# EAGLE board cpu2 (EAGLE 5.00)
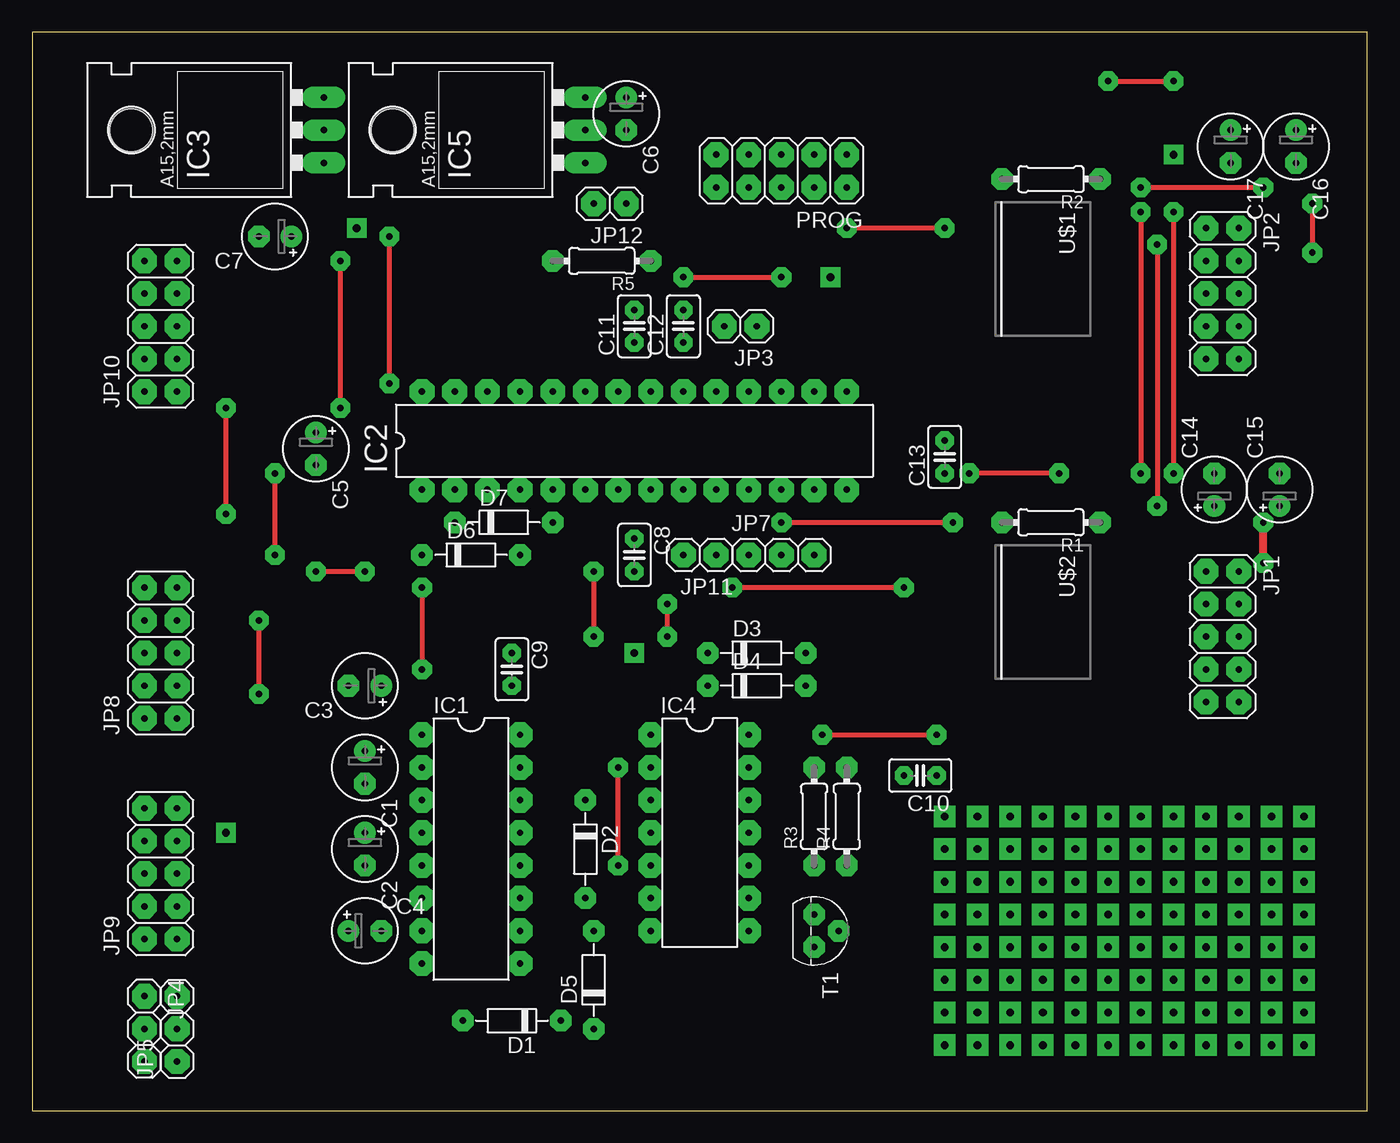
[diagram p0: board, top side]
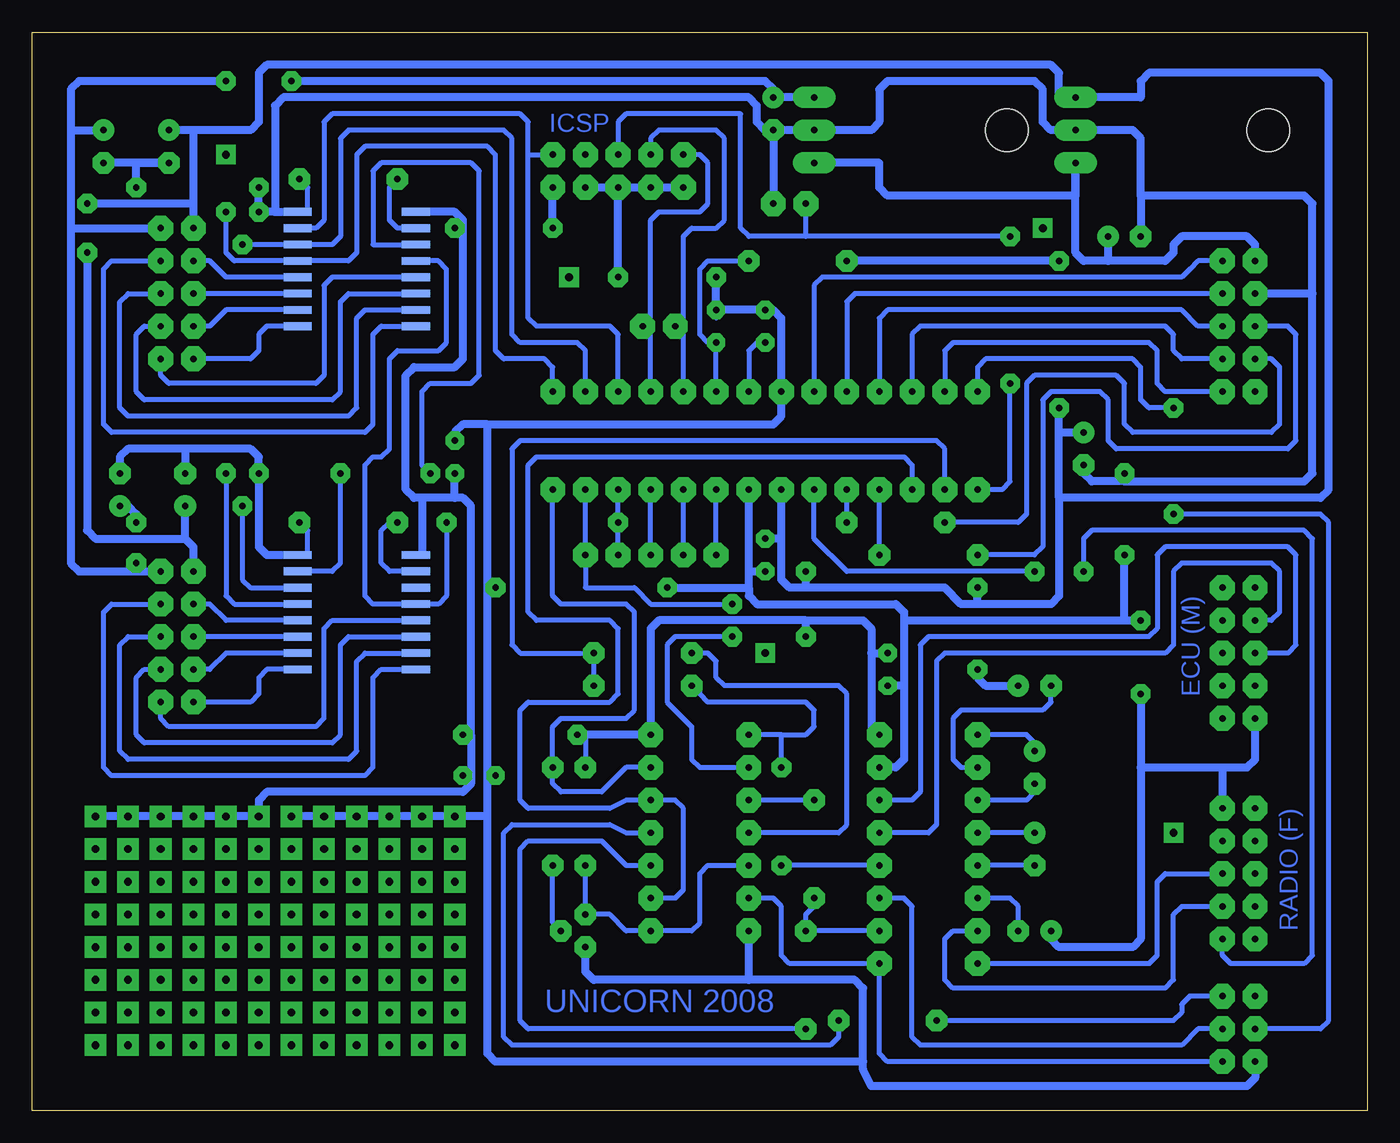
[diagram p1: board, bottom side, seen from below]

Size 103.81 x 83.81 mm. Coordinates in mm from the lower left corner, seen from the top.
Outline: 0,0 103.81,0 103.81,83.81 0,83.81 0,0
Copper layers (1*16): Top 0.035mm / dielectric 1.5mm / Bottom 0.035mm
Design rules "default *": minimum track width 10mil, minimum drill 24mil, track to track 8mil, track to pad 8mil, pad to pad 8mil, via to via 8mil, smd to smd 8mil, copper to edge 40mil, drill to drill 8mil, minimum pad ring 10mil, minimum via ring 8mil, stop-mask expansion 4mil, vias tented up to drill 0mil, thermal gap 10mil

## Footprints (pad centres in the part's own frame; a part is rotated, then mirrored left to right if it is on the bottom)
E2,5-5 = drill 0.5 pad 1.676 round: + -1.27,0 | drill 0.5 pad 1.676 octagon: - 1.27,0
C025-025X050 = drill 0.5 pad 1.422 octagon: 1 -1.27,0; 2 1.27,0
D-7.5 = drill 0.5 pad 1.676 octagon: A 3.81,0; C -3.81,0
DIL16 = drill 0.5 pad 1.93 octagon: 1 -8.89,-3.81; 2 -6.35,-3.81; 3 -3.81,-3.81; 4 -1.27,-3.81; 5 1.27,-3.81; 6 3.81,-3.81; 7 6.35,-3.81; 8 8.89,-3.81; 9 8.89,3.81; 10 6.35,3.81; 11 3.81,3.81; 12 1.27,3.81; 13 -1.27,3.81; 14 -3.81,3.81; 15 -6.35,3.81; 16 -8.89,3.81
DIL28-3 = drill 0.5 pad 1.93 octagon: 1 -16.51,-3.81; 2 -13.97,-3.81; 3 -11.43,-3.81; 4 -8.89,-3.81; 5 -6.35,-3.81; 6 -3.81,-3.81; 7 -1.27,-3.81; 8 1.27,-3.81; 9 3.81,-3.81; 10 6.35,-3.81; 11 8.89,-3.81; 12 11.43,-3.81; 13 13.97,-3.81; 14 16.51,-3.81; 15 16.51,3.81; 16 13.97,3.81; 17 11.43,3.81; 18 8.89,3.81; 19 6.35,3.81; 20 3.81,3.81; 21 1.27,3.81; 22 -1.27,3.81; 23 -3.81,3.81; 24 -6.35,3.81; 25 -8.89,3.81; 26 -11.43,3.81; 27 -13.97,3.81; 28 -16.51,3.81
78XXL = drill 0.5 pad 1.676 long: GND 0,-3.81; IN -2.54,-3.81; OUT 2.54,-3.81 | hole 3.302: 0,11.176
DIL14 = drill 0.5 pad 1.93 octagon: 1 -7.62,-3.81; 2 -5.08,-3.81; 3 -2.54,-3.81; 4 0,-3.81; 5 2.54,-3.81; 6 5.08,-3.81; 7 7.62,-3.81; 8 7.62,3.81; 9 5.08,3.81; 10 2.54,3.81; 11 0,3.81; 12 -2.54,3.81; 13 -5.08,3.81; 14 -7.62,3.81
2X05 = drill 0.5 pad 1.93 octagon: 1 -5.08,-1.27; 2 -5.08,1.27; 3 -2.54,-1.27; 4 -2.54,1.27; 5 0,-1.27; 6 0,1.27; 7 2.54,-1.27; 8 2.54,1.27; 9 5.08,-1.27; 10 5.08,1.27
1X02 = drill 0.5 pad 1.93 octagon: 1 -1.27,0; 2 1.27,0
1X03 = drill 0.5 pad 1.93 octagon: 1 -2.54,0; 2 0,0; 3 2.54,0
0204/7 = drill 0.5 pad 1.676 octagon: 1 -3.81,0; 2 3.81,0
TO92 = drill 0.5 pad 1.676 octagon: 1 1.27,0; 2 0,1.905; 3 -1.27,0
WSOIC16-INV = smd 0.6 x 2.2 bottom: 1 -4.445,-4.6; 2 -3.175,-4.6; 3 -1.905,-4.6; 4 -0.635,-4.6; 5 0.635,-4.6; 6 1.905,-4.6; 7 3.175,-4.6; 8 4.445,-4.6; 9 4.445,4.6; 10 3.175,4.6; 11 1.905,4.6; 12 0.635,4.6; 13 -0.635,4.6; 14 -1.905,4.6; 15 -3.175,4.6; 16 -4.445,4.6

## Placement (x,y rotation side)
C1  [E2,5-5]  25.87,26.66 270 top
C2  [E2,5-5]  25.87,20.32 270 top
C3  [E2,5-5]  25.87,33.02 180 top
C4  [E2,5-5]  25.87,13.96 0 top
C5  [E2,5-5]  22.06,51.43 270 top
C6  [E2,5-5]  46.19,77.47 270 top
C7  [E2,5-5]  18.89,67.94 180 top
C8  [C025-025X050]  46.83,43.17 270 top
C9  [C025-025X050]  37.3,34.28 270 top
C10  [C025-025X050]  69.05,26.03 180 top
C11  [C025-025X050]  46.83,60.95 90 top
C12  [C025-025X050]  50.63,60.95 90 top
C13  [C025-025X050]  70.95,50.8 90 top
C14  [E2,5-5]  91.91,48.25 90 top
C15  [E2,5-5]  96.99,48.25 90 top
C16  [E2,5-5]  98.26,74.92 270 top
C17  [E2,5-5]  93.18,74.92 270 top
D1  [D-7.5]  37.3,6.98 180 top
D2  [D-7.5]  43.02,20.32 270 top
D3  [D-7.5]  56.35,35.56 0 top
D4  [D-7.5]  56.35,33.02 0 top
D5  [D-7.5]  43.65,10.16 90 top
D6  [D-7.5]  34.12,43.17 0 top
D7  [D-7.5]  36.66,45.72 0 top
IC1  MAX232  [DIL16]  34.12,20.32 270 top
IC2  MEGA8-P  [DIL28-3]  46.83,52.06 0 top
IC3  5v  [78XXL]  18.89,76.19 90 top
IC4  4071N  [DIL14]  51.91,21.59 270 top
IC5  3.3v  [78XXL]  39.2,76.19 90 top
JP1  [2X05]  92.55,36.83 270 top
JP2  [2X05]  92.55,63.5 270 top
JP3  [1X02]  55.08,60.95 180 top
JP4  [1X03]  8.72,6.35 270 top
JP5  [1X03]  11.27,6.35 90 top
JP7  [1X03]  58.26,43.17 0 top
JP8  ECU (M)  [2X05]  10,35.56 90 top
JP9  RADIO (F)  [2X05]  10,18.41 90 top
JP10  [2X05]  10,60.95 90 top
JP11  [1X02]  51.91,43.17 180 top
JP12  [1X02]  44.92,70.48 180 top
PROG  [2X05]  58.26,73.02 180 top
R1  [0204/7]  79.21,45.72 180 top
R2  [0204/7]  79.21,72.38 180 top
R3  [0204/7]  60.8,22.86 90 top
R4  [0204/7]  63.34,22.86 90 top
R5  [0204/7]  44.28,66.03 180 top
T1  BC547B  [TO92]  60.8,13.96 270 top
U$1  A6275BOTTOM  [WSOIC16-INV]  78.58,65.4 270 top
U$2  A6275BOTTOM  [WSOIC16-INV]  78.58,38.73 270 top

## Library data of the parts
C1-C17 R1-R5 = rcl
D1-D7 = diode
IC1 = maxim
IC2 = atmel
IC3 IC5 = v-reg
IC4 = 40xx
JP1-JP5 JP7-JP12 PROG = pinhead
T1 = transistor-npn
U$1 U$2 = rnie04

## Nets
0V: C4.+ C5.- C6.- C7.- C8.2 C9.2 C10.2 C11.2 C12.2 C13.2 C14.- C15.- C16.- C17.- IC1.15 IC2.8 IC2.22 IC3.GND IC4.7 IC5.GND JP4.3 JP8.2 JP9.9 JP10.8 JP12.1 PROG.4 PROG.6 PROG.8 PROG.10 R1.1 R2.1 T1.1 U$1.16 U$2.16
+3V3: C6.+ C15.+ C16.+ IC5.OUT JP1.2 JP2.2
+5V: C3.+ C5.+ C8.1 C9.1 C10.1 C13.1 C14.+ C17.+ IC1.16 IC2.7 IC3.OUT IC4.14 JP1.1 JP2.1 PROG.2 R3.2 R5.2 U$1.1 U$2.1
+12V: C7.+ IC3.IN IC5.IN JP10.10
N$1: C2.- IC1.5
N$2: C2.+ IC1.4
N$3: C1.- IC1.3
N$4: C1.+ IC1.1
N$5: U$1.3 U$2.15
N$6: IC2.17 PROG.1 U$1.15
N$7: IC2.16 U$1.14 U$2.14
N$8: IC2.15 U$1.13 U$2.13
N$9: IC2.12 JP7.2 U$1.4 U$2.4
N$10: R1.2 U$2.2
N$11: R2.2 U$1.2
N$12: C3.- IC1.2
N$13: C4.- IC1.6
N$14: D3.A D4.A IC2.2
N$15: IC2.3 IC4.9 IC4.12
N$16: D2.A D5.A IC1.10
N$17: D4.C IC1.12 IC4.1
N$18: D1.A JP5.3
N$19: D1.C IC4.11
N$20: IC2.13 IC4.2 JP7.3
N$21: IC2.14 IC4.13 R4.2
N$22: IC1.11 JP5.2
N$23: IC1.9 IC4.6 JP5.1
N$24: IC1.14 JP8.6
N$25: IC2.18 JP3.1 PROG.9
N$26: D3.C IC4.4
N$27: IC2.19 JP3.2 PROG.7
N$28: D5.C IC4.10
N$29: IC4.5 IC4.8 R3.1 T1.3
N$30: IC2.1 JP12.2 PROG.5
N$31: IC1.13 JP8.8
N$32: IC1.7 JP9.3
N$33: JP2.3 U$1.12
N$34: JP2.5 U$1.11
N$35: JP2.7 U$1.10
N$36: JP2.9 U$1.9
N$37: JP2.4 U$1.8
N$38: JP2.6 U$1.7
N$39: C11.1 IC2.21
N$40: C12.1 IC2.20 R5.1
N$41: JP1.9 U$2.9
N$42: JP1.7 U$2.10
N$43: JP1.5 U$2.11
N$44: JP1.3 U$2.12
N$45: JP1.10 U$2.5
N$46: JP1.8 U$2.6
N$47: JP1.6 U$2.7
N$48: JP1.4 U$2.8
N$49: IC2.24 JP10.7
N$50: IC2.27 JP10.1
N$51: IC2.26 JP10.3
N$52: IC2.25 JP10.5
N$53: IC2.23 JP10.9
N$54: D6.C JP10.6
N$55: D6.A IC2.4
N$56: D7.A IC2.5
N$57: IC2.6 JP9.1
N$58: IC2.11 JP7.1
N$59: IC2.9 JP11.2
N$61: R4.1 T1.2
N$62: IC1.8 JP9.5
N$63: JP2.10 U$1.5
N$64: JP2.8 U$1.6
N$65: IC2.10 JP11.1
N$151: D7.C JP10.4
N$152: IC2.28 JP4.2
N$155: D2.C IC4.3

## Tracks (layer width: path | path; a pad name or v marks a point on that pad's centre or on a via)
0V  (via drill 0.5 pad 1.52, 0.6 pad 1.68)
  Top 0.406: v86.19,69.84 v86.19,49.53 | v67.78,40.64 v54.45,40.64 | v50.63,64.77 v58.26,64.77 | v17.62,38.09 v17.62,32.38 | v86.19,71.75 v95.72,71.75 | v18.89,43.17 v18.89,49.53
  Bottom 0.406: PROG.10 PROG.8 PROG.6 | PROG.6 PROG.4 PROG.6 | 35.4,38.09 23.96,38.09 | 36.03,38.09 36.03,33.02 | U$2.16 82.39,43.17 82.39,45.08 R1.1 | U$1.16 82.39,69.84 82.39,71.75 R2.1 | 68.42,40.64 v67.78,40.64 | C12.2 50.63,61.59
  Bottom 0.61: 48.09,40.64 48.09,41.91 | 48.09,41.91 C8.2 | 48.09,41.91 IC2.8 | 36.03,38.09 36.03,38.73 36.66,39.36 47.46,39.36 48.09,40 48.09,40.64 | 48.09,10.16 60.16,10.16 60.8,10.79 T1.1 | 82.39,43.17 85.56,43.17 86.19,43.81 v86.19,49.53 86.19,50.8 86.83,51.43 91.91,51.43 | 48.09,10.16 IC4.7 | v54.45,40.64 48.09,40.64 | 36.03,33.02 C9.2 | 84.92,69.84 v86.19,69.84 v86.19,71.75 | 84.92,69.84 82.39,69.84 | 68.42,53.33 46.19,53.33 45.55,53.97 IC2.22 45.55,61.59 46.19,62.22 C11.2 C12.2 v50.63,64.77 | 68.42,53.33 68.42,40.64 68.42,26.03 | 68.42,22.86 68.42,26.03 | 68.42,22.86 68.42,4.44 67.78,3.81 39.2,3.81 | 39.2,3.81 39.2,9.52 39.84,10.16 48.09,10.16 | PROG.4 PROG.10 | v58.26,64.77 PROG.6 | 11.27,26.66 JP9.9 | 17.62,26.66 11.27,26.66 | 17.62,26.66 17.62,13.33 18.25,12.7 23.96,12.7 24.6,13.33 C4.+ | 36.03,38.09 35.4,38.09 18.89,38.09 | 18.89,38.09 v17.62,38.09 | v17.62,32.38 17.62,26.66 | 68.42,26.03 C10.2 | 68.42,53.33 70.32,53.33 70.95,52.7 C13.2 | 68.42,22.86 v83.66,22.86 | 91.91,51.43 C14.- | 91.91,51.43 96.36,51.43 96.99,50.8 C15.- | C16.- C17.- 95.72,73.66 v95.72,71.75 | 36.03,38.09 36.03,27.3 36.66,26.66 IC1.15 | 4.28,63.5 JP10.8 | 4.28,63.5 4.28,70.48 4.92,71.11 17.62,71.11 | 17.62,71.11 17.62,75.56 18.25,76.19 IC3.GND 24.6,76.19 25.23,76.83 25.23,79.37 25.87,80 37.3,80 37.94,79.37 37.94,76.83 38.57,76.19 IC5.GND C6.- | C6.- JP12.1 | C6.- 46.83,76.19 47.46,76.83 47.46,78.1 48.09,78.73 84.29,78.73 84.92,78.1 84.92,69.84 | 4.28,63.5 4.28,49.53 4.92,48.89 18.89,48.89 | 18.89,38.09 v18.89,43.17 | 11.27,26.66 9.36,26.66 8.72,27.3 JP8.2 | v18.89,49.53 18.89,48.89 | 18.89,48.89 21.43,48.89 22.06,49.53 C5.- | 17.62,71.11 C7.-
  Bottom 0.61: JP4.3 8.72,2.54 9.36,1.9 38.57,1.9 39.2,3.17 39.2,3.81
+3V3  (via drill 0.5 pad 1.52)
  Top 0.406: v83.66,80 v88.73,80
  Top 0.61: v95.72,42.54 v95.72,45.72
  Bottom 0.61: 100.8,68.58 JP2.2 | 100.8,76.19 100.8,79.37 100.17,80 v88.73,80 | 100.8,76.19 100.8,68.58 | 95.72,41.91 JP1.2 | 100.8,68.58 100.8,42.54 100.17,41.91 95.72,41.91 | v95.72,45.72 95.72,46.35 96.36,46.98 C15.+ | 95.72,41.91 v95.72,42.54 | 100.8,76.19 C16.+ | IC5.OUT C6.+ 46.19,79.37 46.83,80 v83.66,80
+5V  (via drill 0.5 pad 1.52, 0.6 pad 1.68)
  Top 0.406: v23.96,54.61 v23.96,66.03 | v43.65,41.91 v43.65,36.83 | v99.53,70.48 v99.53,66.67 | v70.95,68.58 v63.34,68.58 | v61.43,29.21 v70.32,29.21 | v30.32,40.64 v30.32,34.28
  Bottom 0.406: v61.43,29.21 60.8,29.21 R3.2 | 73.5,43.17 U$2.1
  Bottom 0.61: 91.28,76.19 91.28,70.48 | 91.28,70.48 JP2.1 | v23.96,66.03 R5.2 | 43.65,40.64 44.92,40.64 45.55,41.27 45.55,44.44 | 45.55,44.44 C8.1 | 45.55,44.44 IC2.7 | 43.65,40.64 v43.65,41.91 | 43.65,40.64 32.86,40.64 31.59,39.36 30.32,39.36 | 30.32,39.36 24.6,39.36 23.96,40 23.96,47.62 | 23.96,47.62 23.96,52.7 | 23.96,52.7 v23.96,54.61 | IC1.16 38.57,29.21 38.57,35.56 | 43.65,38.09 39.2,38.09 38.57,37.46 38.57,35.56 | v43.65,36.83 43.65,38.09 | 43.65,38.09 55.08,38.09 55.72,37.46 IC4.14 v61.43,29.21 | 70.32,68.58 70.32,69.21 70.95,69.84 U$1.1 | 73.5,47.62 73.5,43.17 | 73.5,47.62 74.13,47.62 74.77,48.25 74.77,57.14 74.13,57.78 70.95,57.78 70.32,58.42 70.32,68.58 | 70.32,68.58 v70.95,68.58 | v99.53,66.67 99.53,45.08 98.89,44.44 91.91,44.44 | 91.91,44.44 91.28,43.81 JP1.1 | 91.28,70.48 v99.53,70.48 | 38.57,35.56 C9.1 | 69.69,29.21 69.69,46.98 70.32,47.62 70.95,47.62 | 70.95,47.62 73.5,47.62 | v63.34,68.58 PROG.2 | C3.+ 29.68,33.02 30.32,33.65 v30.32,34.28 | 30.32,39.36 v30.32,40.64 | 69.69,26.03 C10.1 | v70.32,29.21 69.69,29.21 | 69.69,29.21 69.69,26.03 | 70.95,47.62 C13.1 | v98.89,22.86 v86.19,22.86 86.19,24.12 85.56,24.76 70.32,24.76 69.69,25.39 69.69,26.03 | 91.91,44.44 C14.+ | 91.28,76.19 C17.+ | 91.28,76.19 86.83,76.19 86.19,76.83 86.19,80.64 85.56,81.27 24.6,81.27 23.96,80.64 23.96,78.73 IC3.OUT 17.62,78.73 17.62,80 16.98,80.64 3.65,80.64 3.01,80 3.01,48.25 3.65,47.62 23.96,47.62 | 23.96,52.7 C5.+
+12V
  Bottom 0.61: IC5.IN 37.94,73.66 37.94,71.75 37.3,71.11 22.7,71.11 IC3.IN 22.7,66.67 22.06,66.03 20.16,66.03 | JP10.10 8.72,67.3 9.36,67.94 14.44,67.94 15.07,67.3 15.07,66.67 15.71,66.03 20.16,66.03 | 20.16,66.03 C7.+
N$1
  Bottom 0.406: C2.- IC1.5
N$2
  Bottom 0.406: C2.+ IC1.4
N$3
  Bottom 0.406: IC1.3 26.5,24.12 25.87,24.76 C1.-
N$4
  Bottom 0.406: C1.+ 25.87,28.57 26.5,29.21 IC1.1
N$5  (via drill 0.5 pad 1.52)
  Top 0.406: v79.84,49.53 v72.86,49.53
  Bottom 0.406: U$2.15 80.48,41.91 79.84,42.54 v79.84,49.53 | U$1.3 77.31,67.3 77.31,73.02 76.67,73.66 69.69,73.66 69.05,73.02 69.05,57.14 69.69,56.51 72.86,56.51 73.5,55.88 73.5,50.16 v72.86,49.53
N$6
  Bottom 0.406: IC2.17 58.26,60.32 58.89,60.95 64.6,60.95 65.24,61.59 65.24,74.29 | 65.24,74.29 PROG.1 | U$1.15 81.75,68.58 81.11,69.21 81.11,76.83 80.48,77.47 65.88,77.47 65.24,76.83 65.24,74.29
N$7  (via drill 0.5 pad 1.52)
  Top 0.406: v87.47,67.3 v87.47,46.98
  Bottom 0.406: v87.47,46.98 87.47,41.27 86.83,40.64 U$2.14 | v87.47,67.3 U$1.14 80.48,67.3 79.84,67.94 79.84,75.56 79.21,76.19 67.14,76.19 66.51,75.56 66.51,60.32 65.88,59.69 61.43,59.69 60.8,59.05 IC2.16
N$8  (via drill 0.5 pad 1.52)
  Top 0.406: v88.73,69.84 v88.73,49.53
  Bottom 0.406: v88.73,49.53 88.73,40 88.1,39.36 U$2.13 | v88.73,69.84 88.73,66.67 88.1,66.03 U$1.13 79.21,66.03 78.58,66.67 78.58,74.29 77.94,74.92 68.42,74.92 67.78,74.29 67.78,59.05 67.14,58.42 63.97,58.42 63.34,57.78 IC2.15
N$9  (via drill 0.5 pad 1.52)
  Top 0.406: v58.26,45.72 v71.59,45.72
  Bottom 0.406: JP7.2 v58.26,45.72 IC2.12 | U$1.4 72.22,66.03 71.59,65.4 71.59,59.69 72.22,59.05 75.4,59.05 76.03,58.42 76.03,51.43 76.67,50.8 77.31,50.8 77.94,50.16 77.94,40 77.31,39.36 74.13,39.36 | 74.13,39.36 U$2.4 | v71.59,45.72 71.59,40 72.22,39.36 74.13,39.36
N$10
  Bottom 0.406: U$2.2 76.03,41.91 76.67,42.54 76.67,45.08 76.03,45.72 R1.2
N$11
  Bottom 0.406: U$1.2 75.4,68.58 76.03,69.21 76.03,71.75 R2.2
N$12
  Bottom 0.406: C3.- 24.6,31.75 25.23,31.11 31.59,31.11 32.22,30.48 32.22,27.3 31.59,26.66 IC1.2
N$13
  Bottom 0.406: C4.- 27.14,15.87 27.77,16.51 IC1.6
N$14
  Bottom 0.406: IC2.2 32.86,51.43 33.49,52.06 65.88,52.06 66.51,51.43 66.51,36.19 65.88,35.56 D3.A D4.A
N$15
  Bottom 0.406: IC2.3 35.4,50.16 36.03,50.8 64.6,50.8 65.24,50.16 65.24,38.73 64.6,38.09 58.89,38.09 58.26,37.46 58.26,32.38 58.89,31.75 65.24,31.75 65.88,31.11 65.88,24.12 65.24,23.49 58.89,23.49 57.62,24.12 IC4.12 53.81,24.12 53.17,23.49 53.17,17.14 53.81,16.51 IC4.9
N$16
  Bottom 0.406: IC1.10 D5.A 43.65,15.23 43.02,15.87 D2.A
N$17  (via drill 0.5 pad 1.52)
  Top 0.406: v45.55,19.05 v45.55,26.66
  Bottom 0.406: D4.C 51.91,33.02 51.91,32.38 51.27,31.75 43.65,31.75 43.02,31.11 43.02,29.84 43.65,29.21 45.55,29.21 | IC1.12 v45.55,19.05 | v45.55,26.66 45.55,29.21 | 45.55,29.21 IC4.1
N$18
  Bottom 0.406: JP5.3 13.8,8.88 14.44,8.25 14.44,7.62 15.07,6.98 D1.A
N$19
  Bottom 0.406: IC4.11 57.62,21.59 58.89,22.22 66.51,22.22 67.14,21.59 67.14,5.71 66.51,5.08 41.74,5.08 41.11,5.71 D1.C
N$20  (via drill 0.5 pad 1.52)
  Top 0.406: v49.37,39.36 v49.37,36.83
  Bottom 0.406: IC2.13 JP7.3 60.8,40.64 56.98,40.64 55.72,39.36 v49.37,39.36 | v49.37,36.83 53.81,36.83 54.45,36.19 54.45,31.75 52.54,29.84 52.54,27.3 51.91,26.66 IC4.2
N$21
  Bottom 0.406: IC4.13 57.62,26.66 59.52,24.76 62.7,24.76 63.34,25.39 R4.2 63.34,29.84 62.7,30.48 57.62,30.48 56.98,31.11 56.98,38.73 57.62,39.36 62.7,39.36 63.34,40 IC2.14
N$22
  Bottom 0.406: JP5.2 13.17,6.35 14.44,5.08 34.76,5.08 35.4,5.71 35.4,15.87 36.03,16.51 IC1.11
N$23
  Bottom 0.406: IC4.6 46.19,16.51 45.55,15.87 45.55,12.06 44.92,11.43 IC1.9 37.94,4.44 37.3,3.81 JP5.1
N$24
  Bottom 0.406: JP8.6 6.19,35.56 5.55,36.19 5.55,43.17 6.19,43.81 15.71,43.81 16.34,43.17 16.34,37.46 16.98,36.83 34.12,36.83 34.76,36.19 34.76,24.76 35.4,24.12 IC1.14
N$25
  Bottom 0.406: 55.72,60.95 55.72,69.21 55.08,69.84 51.91,69.84 51.27,70.48 51.27,73.66 51.91,74.29 PROG.9 | IC2.18 55.72,60.95 | 55.72,60.95 JP3.1
N$26
  Bottom 0.406: D3.C 51.27,35.56 50.63,34.92 50.63,33.65 50,33.02 41.11,33.02 40.48,32.38 40.48,22.22 41.11,21.59 IC4.4
N$27
  Bottom 0.406: 53.17,60.95 53.17,67.94 52.54,68.58 50.63,68.58 50,69.21 50,75.56 50.63,76.19 55.08,76.19 55.72,75.56 PROG.7 | 53.17,60.95 JP3.2 | IC2.19 53.17,60.95
N$28
  Bottom 0.406: IC4.10 57.62,19.05 59.52,20.95 65.24,20.95 65.88,20.32 65.88,6.98 65.24,6.35 D5.C
N$29
  Bottom 0.406: IC4.5 51.27,19.05 51.91,18.41 51.91,14.6 52.54,13.96 IC4.8 57.62,13.96 58.89,15.23 T1.3 R3.1
N$30  (via drill 0.5 pad 1.52)
  Top 0.406: v27.77,56.51 v27.77,67.94
  Bottom 0.406: PROG.5 58.26,76.83 57.62,77.47 48.73,77.47 48.73,68.58 48.09,67.94 43.65,67.94 | IC2.1 28.41,48.25 27.77,48.89 v27.77,56.51 | v27.77,67.94 43.65,67.94 | 43.65,67.94 JP12.2
N$31
  Bottom 0.406: JP8.8 7.46,38.09 6.82,38.73 6.82,41.91 7.46,42.54 14.44,42.54 15.07,41.91 15.07,36.19 15.71,35.56 32.86,35.56 33.49,34.92 33.49,22.22 34.12,21.59 IC1.13
N$32
  Bottom 0.406: JP9.3 14.44,15.87 15.07,15.23 15.07,10.16 15.71,9.52 32.22,9.52 32.86,10.16 32.86,13.33 32.22,13.96 IC1.7
N$33
  Bottom 0.406: U$1.12 88.73,64.77 90,66.03 JP2.3
N$34
  Bottom 0.406: U$1.11 JP2.5
N$35
  Bottom 0.406: U$1.10 88.73,62.22 90,60.95 JP2.7
N$36
  Bottom 0.406: U$1.9 85.56,60.95 86.19,60.32 86.19,59.05 86.83,58.42 JP2.9
N$37
  Bottom 0.406: U$1.8 76.67,60.95 77.31,60.32 77.31,53.33 77.94,52.7 97.62,52.7 98.26,53.33 98.26,65.4 97.62,66.03 JP2.4
N$38
  Bottom 0.406: U$1.7 77.94,62.22 78.58,61.59 78.58,54.61 79.21,53.97 96.36,53.97 96.99,54.61 96.99,62.86 96.36,63.5 JP2.6
N$39
  Bottom 0.406: C11.1 47.46,59.69 48.09,59.05 IC2.21
N$40
  Bottom 0.406: IC2.20 C12.1 51.27,59.69 51.91,60.32 51.91,65.4 51.27,66.03 R5.1
N$41
  Bottom 0.406: U$2.9 85.56,34.28 86.19,33.65 86.19,32.38 86.83,31.75 JP1.9
N$42
  Bottom 0.406: U$2.10 88.73,35.56 90,34.28 JP1.7
N$43
  Bottom 0.406: U$2.11 JP1.5
N$44
  Bottom 0.406: U$2.12 88.73,38.09 90,39.36 JP1.3
N$45
  Bottom 0.406: U$2.5 80.48,38.09 81.11,37.46 81.11,30.48 81.75,29.84 93.18,29.84 93.81,30.48 JP1.10
N$46
  Bottom 0.406: U$2.6 79.21,36.83 79.84,36.19 79.84,29.21 80.48,28.57 95.08,28.57 95.72,29.21 95.72,33.65 95.08,34.28 JP1.8
N$47
  Bottom 0.406: U$2.7 77.94,35.56 78.58,34.92 78.58,27.93 79.21,27.3 96.36,27.3 96.99,27.93 96.99,36.19 96.36,36.83 JP1.6
N$48
  Bottom 0.406: U$2.8 76.67,34.28 77.31,33.65 77.31,26.66 77.94,26.03 97.62,26.03 98.26,26.66 98.26,38.73 97.62,39.36 JP1.4
N$49
  Bottom 0.406: JP10.7 39.84,63.5 40.48,62.86 IC2.24
N$50
  Bottom 0.406: JP10.1 15.71,55.88 16.34,56.51 16.34,59.05 16.98,59.69 32.22,59.69 32.86,59.05 IC2.27
N$51
  Bottom 0.406: JP10.3 14.44,58.42 15.07,59.05 15.07,60.32 15.71,60.95 34.76,60.95 35.4,60.32 IC2.26
N$52
  Bottom 0.406: JP10.5 13.17,60.95 14.44,62.22 37.3,62.22 37.94,61.59 IC2.25
N$53
  Bottom 0.406: JP10.9 13.17,66.03 13.8,65.4 14.44,64.77 42.38,64.77 43.02,64.13 IC2.23
N$54
  Bottom 0.406: JP10.6 6.19,60.95 5.55,60.32 5.55,52.06 6.19,51.43 19.52,51.43 20.16,52.06 20.16,55.24 20.79,55.88 24.6,55.88 25.23,55.24 25.23,43.81 25.87,43.17 D6.C
N$55
  Bottom 0.406: D6.A IC2.4
N$56
  Bottom 0.406: D7.A IC2.5
N$57  (via drill 0.5 pad 1.52)
  Top 0.406: v22.06,41.91 v25.87,41.91
  Bottom 0.406: v25.87,41.91 40.48,41.91 43.02,44.44 IC2.6 | v22.06,41.91 22.06,44.44 21.43,45.08 4.92,45.08 4.28,44.44 4.28,12.06 4.92,11.43 10.63,11.43 11.27,12.06 JP9.1
N$58
  Bottom 0.406: JP7.1 IC2.11
N$59
  Bottom 0.406: JP11.2 IC2.9
N$61
  Bottom 0.406: T1.2 63.34,14.6 R4.1
N$62
  Bottom 0.406: JP9.5 15.71,18.41 16.34,17.77 16.34,12.06 16.98,11.43 IC1.8
N$63
  Bottom 0.406: U$1.5 80.48,64.77 81.11,64.13 81.11,57.14 81.75,56.51 93.18,56.51 93.81,57.14 JP2.10
N$64
  Bottom 0.406: U$1.6 79.21,63.5 79.84,62.86 79.84,55.88 80.48,55.24 95.08,55.24 95.72,55.88 95.72,60.32 95.08,60.95 JP2.8
N$65
  Bottom 0.406: JP11.1 IC2.10
N$66  (via drill 0.6 pad 1.68)
  other vias: 73.5,17.77
N$67  (via drill 0.6 pad 1.68)
  other vias: 76.03,17.77
N$68  (via drill 0.6 pad 1.68)
  other vias: 73.5,15.23
N$69  (via drill 0.6 pad 1.68)
  other vias: 76.03,15.23
N$70  (via drill 0.6 pad 1.68)
  other vias: 73.5,12.7
N$71  (via drill 0.6 pad 1.68)
  other vias: 76.03,12.7
N$72  (via drill 0.6 pad 1.68)
  other vias: 73.5,10.16
N$73  (via drill 0.6 pad 1.68)
  other vias: 76.03,10.16
N$74  (via drill 0.6 pad 1.68)
  other vias: 76.03,7.62
N$75  (via drill 0.6 pad 1.68)
  other vias: 73.5,7.62
N$76  (via drill 0.6 pad 1.68)
  other vias: 73.5,5.08
N$77  (via drill 0.6 pad 1.68)
  other vias: 76.03,5.08
N$78  (via drill 0.6 pad 1.68)
  other vias: 78.58,5.08
N$79  (via drill 0.6 pad 1.68)
  other vias: 78.58,7.62
N$80  (via drill 0.6 pad 1.68)
  other vias: 78.58,10.16
N$81  (via drill 0.6 pad 1.68)
  other vias: 78.58,12.7
N$82  (via drill 0.6 pad 1.68)
  other vias: 78.58,15.23
N$83  (via drill 0.6 pad 1.68)
  other vias: 78.58,17.77
N$84  (via drill 0.6 pad 1.68)
  other vias: 73.5,20.32
N$85  (via drill 0.6 pad 1.68)
  other vias: 76.03,20.32
N$86  (via drill 0.6 pad 1.68)
  other vias: 78.58,20.32
N$87  (via drill 0.6 pad 1.68)
  other vias: 70.95,20.32
N$88  (via drill 0.6 pad 1.68)
  other vias: 70.95,17.77
N$89  (via drill 0.6 pad 1.68)
  other vias: 70.95,15.23
N$90  (via drill 0.6 pad 1.68)
  other vias: 70.95,12.7
N$91  (via drill 0.6 pad 1.68)
  other vias: 70.95,10.16
N$92  (via drill 0.6 pad 1.68)
  other vias: 70.95,7.62
N$93  (via drill 0.6 pad 1.68)
  other vias: 70.95,5.08
N$94  (via drill 0.6 pad 1.68)
  other vias: 83.66,17.77
N$95  (via drill 0.6 pad 1.68)
  other vias: 86.19,17.77
N$96  (via drill 0.6 pad 1.68)
  other vias: 83.66,15.23
N$97  (via drill 0.6 pad 1.68)
  other vias: 86.19,15.23
N$98  (via drill 0.6 pad 1.68)
  other vias: 83.66,12.7
N$99  (via drill 0.6 pad 1.68)
  other vias: 86.19,12.7
N$100  (via drill 0.6 pad 1.68)
  other vias: 83.66,10.16
N$101  (via drill 0.6 pad 1.68)
  other vias: 86.19,10.16
N$102  (via drill 0.6 pad 1.68)
  other vias: 86.19,7.62
N$103  (via drill 0.6 pad 1.68)
  other vias: 83.66,7.62
N$104  (via drill 0.6 pad 1.68)
  other vias: 83.66,5.08
N$105  (via drill 0.6 pad 1.68)
  other vias: 86.19,5.08
N$106  (via drill 0.6 pad 1.68)
  other vias: 88.73,5.08
N$107  (via drill 0.6 pad 1.68)
  other vias: 88.73,7.62
N$108  (via drill 0.6 pad 1.68)
  other vias: 88.73,10.16
N$109  (via drill 0.6 pad 1.68)
  other vias: 88.73,12.7
N$110  (via drill 0.6 pad 1.68)
  other vias: 88.73,15.23
N$111  (via drill 0.6 pad 1.68)
  other vias: 88.73,17.77
N$112  (via drill 0.6 pad 1.68)
  other vias: 83.66,20.32
N$113  (via drill 0.6 pad 1.68)
  other vias: 86.19,20.32
N$114  (via drill 0.6 pad 1.68)
  other vias: 88.73,20.32
N$115  (via drill 0.6 pad 1.68)
  other vias: 81.11,20.32
N$116  (via drill 0.6 pad 1.68)
  other vias: 81.11,17.77
N$117  (via drill 0.6 pad 1.68)
  other vias: 81.11,15.23
N$118  (via drill 0.6 pad 1.68)
  other vias: 81.11,12.7
N$119  (via drill 0.6 pad 1.68)
  other vias: 81.11,10.16
N$120  (via drill 0.6 pad 1.68)
  other vias: 81.11,7.62
N$121  (via drill 0.6 pad 1.68)
  other vias: 81.11,5.08
N$122  (via drill 0.6 pad 1.68)
  other vias: 93.81,17.77
N$123  (via drill 0.6 pad 1.68)
  other vias: 96.36,17.77
N$124  (via drill 0.6 pad 1.68)
  other vias: 93.81,15.23
N$125  (via drill 0.6 pad 1.68)
  other vias: 96.36,15.23
N$126  (via drill 0.6 pad 1.68)
  other vias: 93.81,12.7
N$127  (via drill 0.6 pad 1.68)
  other vias: 96.36,12.7
N$128  (via drill 0.6 pad 1.68)
  other vias: 93.81,10.16
N$129  (via drill 0.6 pad 1.68)
  other vias: 96.36,10.16
N$130  (via drill 0.6 pad 1.68)
  other vias: 96.36,7.62
N$131  (via drill 0.6 pad 1.68)
  other vias: 93.81,7.62
N$132  (via drill 0.6 pad 1.68)
  other vias: 93.81,5.08
N$133  (via drill 0.6 pad 1.68)
  other vias: 96.36,5.08
N$134  (via drill 0.6 pad 1.68)
  other vias: 98.89,5.08
N$135  (via drill 0.6 pad 1.68)
  other vias: 98.89,7.62
N$136  (via drill 0.6 pad 1.68)
  other vias: 98.89,10.16
N$137  (via drill 0.6 pad 1.68)
  other vias: 98.89,12.7
N$138  (via drill 0.6 pad 1.68)
  other vias: 98.89,15.23
N$139  (via drill 0.6 pad 1.68)
  other vias: 98.89,17.77
N$140  (via drill 0.6 pad 1.68)
  other vias: 93.81,20.32
N$141  (via drill 0.6 pad 1.68)
  other vias: 96.36,20.32
N$142  (via drill 0.6 pad 1.68)
  other vias: 98.89,20.32
N$143  (via drill 0.6 pad 1.68)
  other vias: 91.28,20.32
N$144  (via drill 0.6 pad 1.68)
  other vias: 91.28,17.77
N$145  (via drill 0.6 pad 1.68)
  other vias: 91.28,15.23
N$146  (via drill 0.6 pad 1.68)
  other vias: 91.28,12.7
N$147  (via drill 0.6 pad 1.68)
  other vias: 91.28,10.16
N$148  (via drill 0.6 pad 1.68)
  other vias: 91.28,7.62
N$149  (via drill 0.6 pad 1.68)
  other vias: 91.28,5.08
N$150  (via drill 0.6 pad 1.52)
  other vias: 88.73,74.29
N$151
  Bottom 0.406: JP10.4 7.46,58.42 6.82,57.78 6.82,53.33 7.46,52.7 18.25,52.7 18.89,53.33 18.89,56.51 19.52,57.14 25.87,57.14 26.5,56.51 26.5,46.35 27.14,45.72 D7.C
N$152  (via drill 0.5 pad 1.52)
  Top 0.406: v15.07,46.35 v15.07,54.61
  Bottom 0.406: IC2.28 30.32,57.78 29.68,58.42 18.25,58.42 17.62,57.78 17.62,55.24 16.98,54.61 v15.07,54.61 | v15.07,46.35 3.65,46.35 3.01,45.72 3.01,6.98 3.65,6.35 JP4.2
N$153  (via drill 0.6 pad 1.52)
  other vias: 7.46,76.19
N$154  (via drill 0.6 pad 1.52)
  other vias: 27.77,76.19
N$155
  Bottom 0.406: D2.C IC4.3
N$175  (via drill 0.6 pad 1.68)
  other vias: 70.95,22.86
N$176  (via drill 0.6 pad 1.68)
  other vias: 73.5,22.86
N$177  (via drill 0.6 pad 1.68)
  other vias: 76.03,22.86
N$178  (via drill 0.6 pad 1.68)
  other vias: 78.58,22.86
N$179  (via drill 0.6 pad 1.68)
  other vias: 81.11,22.86
N$181  (via drill 0.6 pad 1.52)
  other vias: 46.83,35.56 62.06,64.77 25.23,68.58
N$182  (via drill 0.6 pad 1.68)
  other vias: 88.73,22.86
N$183  (via drill 0.6 pad 1.68)
  other vias: 91.28,22.86
N$184  (via drill 0.6 pad 1.68)
  other vias: 93.81,22.86
N$185  (via drill 0.6 pad 1.68)
  other vias: 96.36,22.86
N$186  (via drill 0.6 pad 1.52)
  other vias: 15.07,21.59

## Text on the board
Bottom: ICSP | ECU (M) | RADIO (F) | UNICORN 2008